# Altium PCB Buck-Converter-MP2315.pcbdoc
Units mil, origin at the board's own origin, x right, y up, seen from the top; angles counter-clockwise.
Board outline 2192.5 x 1797.4 mil, 2 copper layers (Top Layer, Bottom Layer); 23 components, 11 nets, 54 pads, 22 vias.
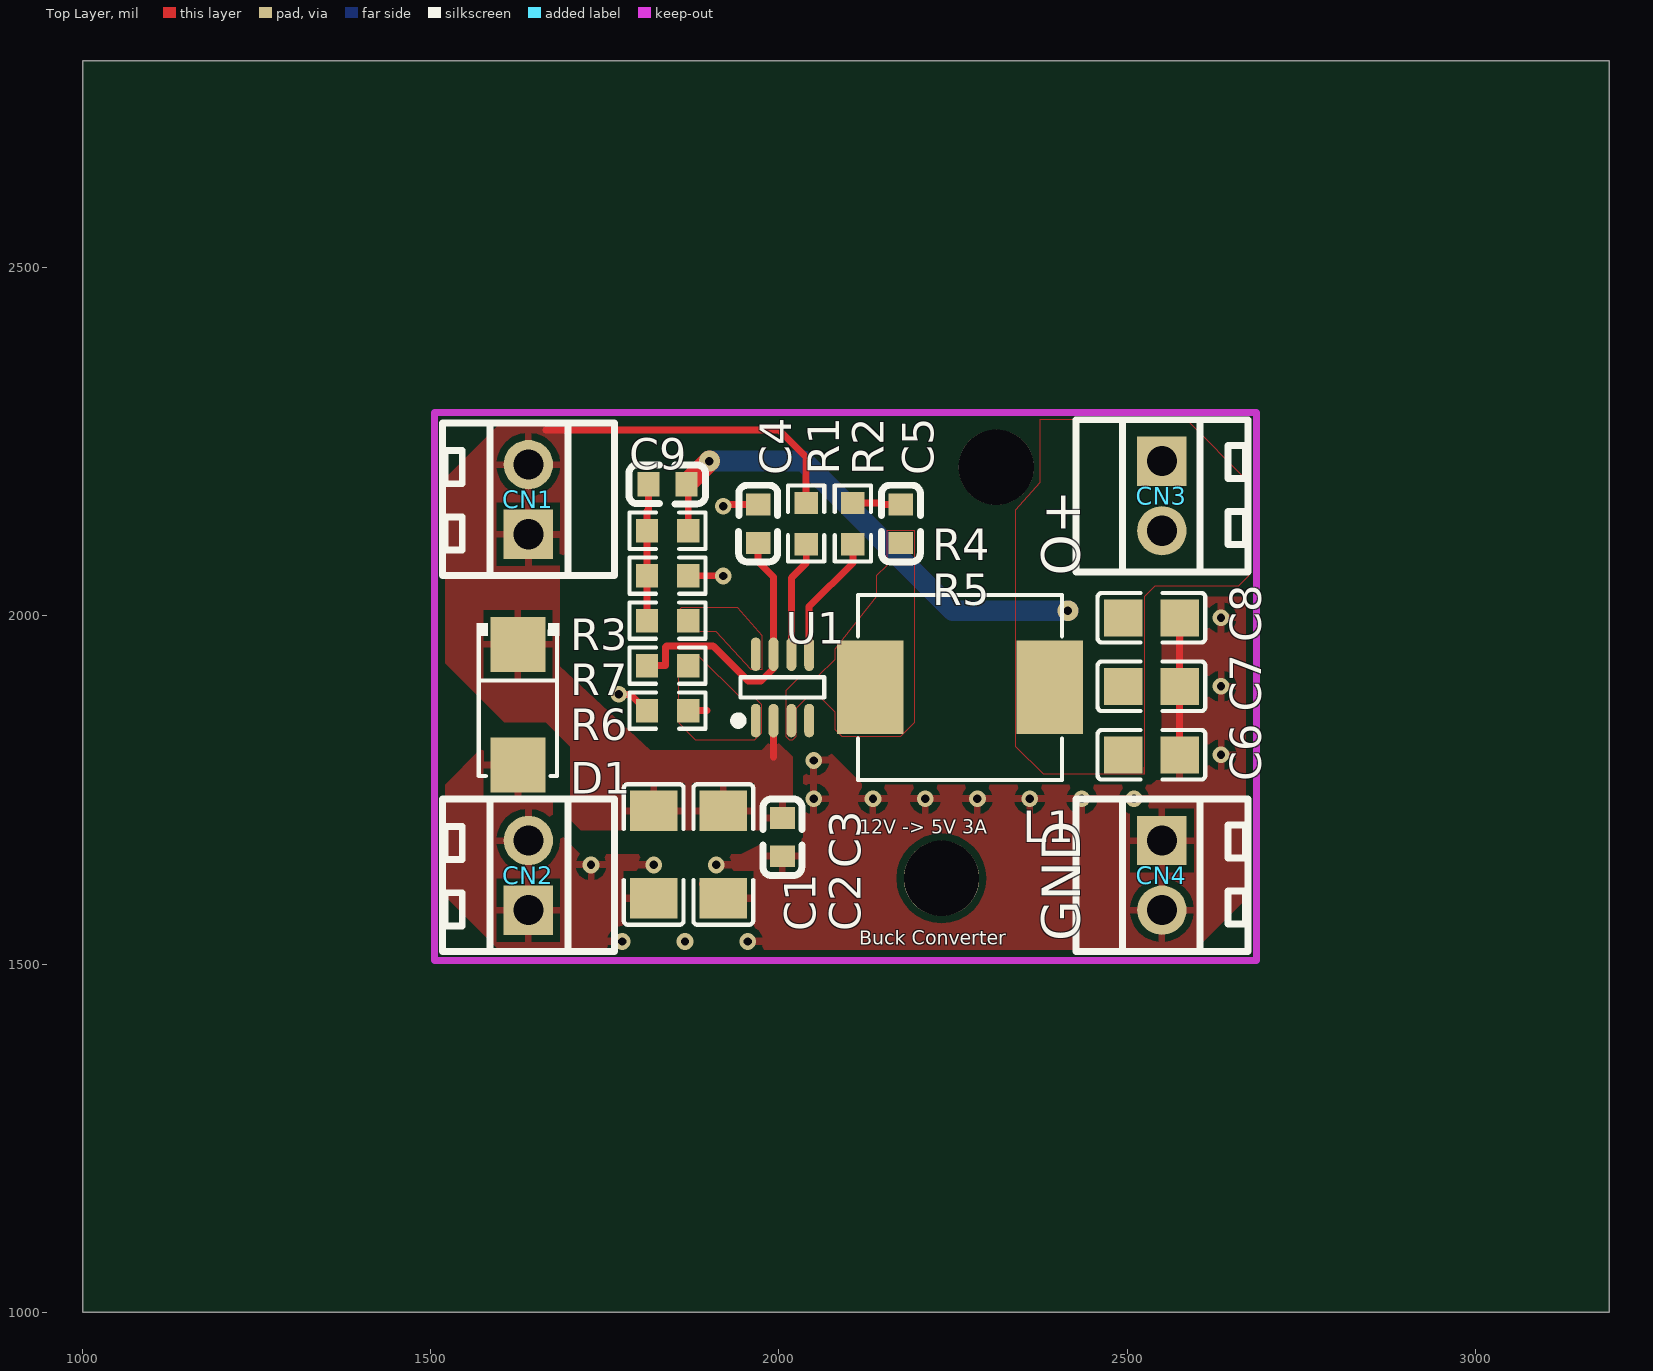
[diagram p0: Top Layer view]
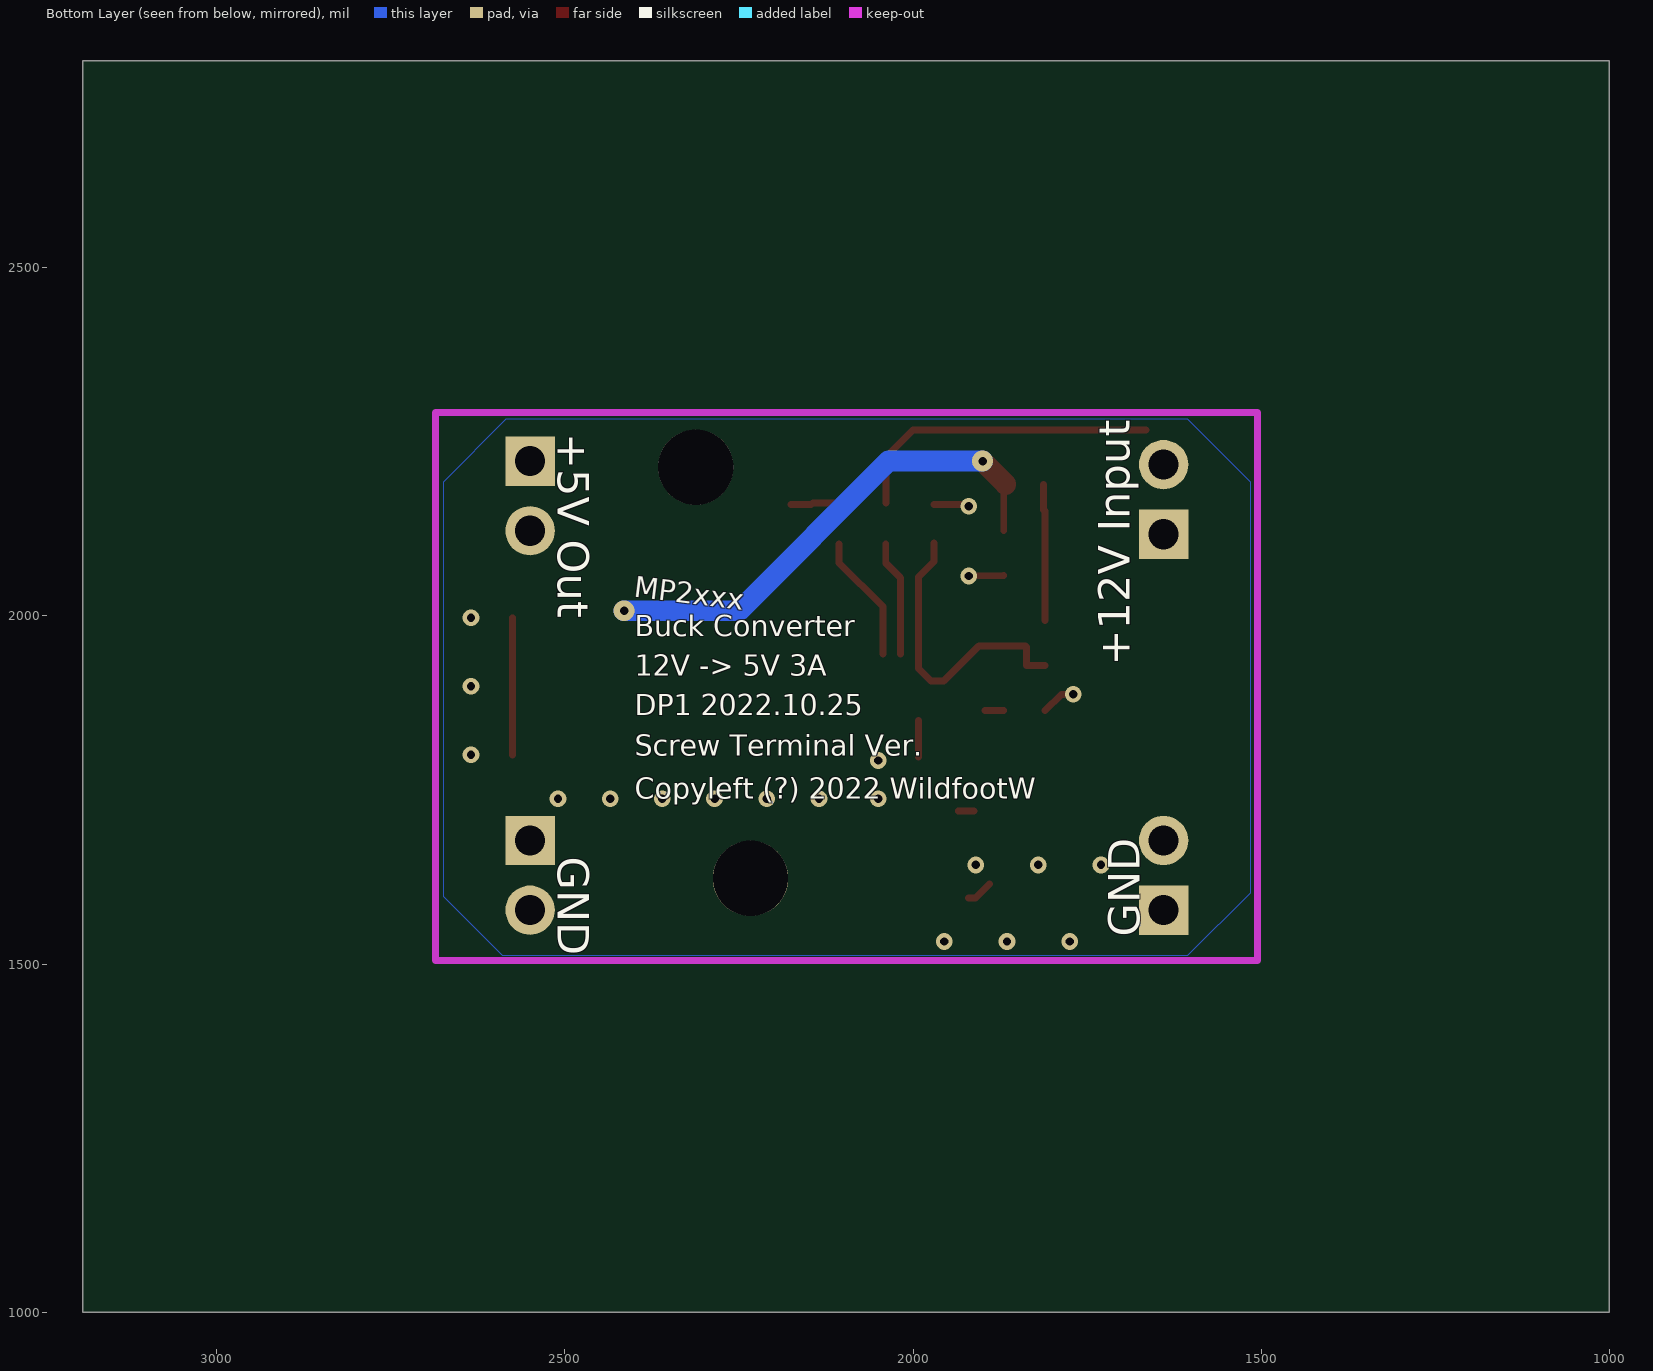
[diagram p1: Bottom Layer view, seen from below]

## Layer stack, top to bottom
Top Solder: solder mask 0.4, Solder Resist, Dk 3.5
Top Layer: signal copper 1.4
Dielectric1: dielectric 12.6, FR-4, Dk 4.8
Bottom Layer: signal copper 1.4
Bottom Solder: solder mask 0.4, Solder Resist, Dk 3.5

## Board outline
3192.5,1000 1000,1000 1000,2797.4 3192.5,2797.4

## Design rules (kind name [scope] priority, off if disabled: settings)
Clearance [All] p1: gap=10 ignorepadtopadclearanceinfootprint=FALSE except(0: Arc-Hole Track-Hole SMDPad-Hole THPad-Hole Via-Hole Fill-Hole Poly-Hole Region-Hole Text-Hole)
PolygonConnect [All] p1: connectstyle=Relief reliefconductorwidth=10 reliefentries=4 polygonreliefangle="90 Angle" airgapwidth=10
RoutingVias [All] p1: holewidth=28 width=50 viastyle="Through Hole" minholewidth=28 minwidth=50 maxholewidth=28 maxwidth=50
SolderMaskExpansion [All] p1: expansion=4 istentingtop=FALSE
Width [All] p1: maxlimit=10 minlimit=10 preferedwidth=10
30 further rules are at their usual default settings.

## Components (designator, comment, footprint, x,y, rotation, side; value= is the part's Value field where it differs from the comment)
C1 "22uF" C1206 1820,1657.4 r90 top
C2 "N/A" C1206 1920,1657.4 r90 top
C3 "0.1uf" C0603 2005,1682.4 r90 top
C4 "0.1uf" C0603 1970,2132.4 r270 top
C5 "0.1uf" C0603 2175,2132.4 r270 top
C6 "22uF" C0805 2535,1800.55 r180 top
C7 "22uF" C0805 2535,1898.98 r180 top
C8 "N/A" C0805 2535,1997.4 r180 top
C9 "33pf" C0603 1839.81,2188.96 r0 top
CN1 "DB125-2.54-2P-GN" CONN-TH_DB125-2.54-2P-GN 1640,2167.4 r90 top
CN2 "DB125-2.54-2P-GN" CONN-TH_DB125-2.54-2P-GN 1640,1627.4 r90 top
CN3 "DB125-2.54-2P-GN" CONN-TH_DB125-2.54-2P-GN 2550,2172.4 r270 top
CN4 "DB125-2.54-2P-GN" CONN-TH_DB125-2.54-2P-GN 2550,1627.4 r270 top
D1 "SMAJ12A" SMA_L4.3-W2.6-LS5.1-RD 1625,1872.4 r270 top
L1 "4.7uH" IND-SMD_L7.3-W6.6 2260,1897.4 r180 top
R1 "100K" R0603 2039.12,2132.7 r270 top
R2 "10R" R0603 2106.09,2132.7 r90 top
R3 "20K" R0603 1840,1993.18 r180 top
R4 "40.2K" R0603 1840,2122.4 r0 top
R5 "7.5K" R0603 1840,2057.79 r180 top
R6 "9.09K" R0603 1840,1863.96 r0 top
R7 "100K" R0603 1840,1928.57 r180 top
U1 "MP2315GJ-Z" TSOT-23-8_L2.9-W1.6-P0.65-LS2.8-BR 2005,1897.4 r270 top

## Footprints (in the part's own frame and the unit in brackets; to place one, negate y for a bottom-side part, rotate by r counter-clockwise, add the part's x,y. Pads: shape width x height; smd on the part's side, far side on the other; paste and mask are expansions set on the pad)
C0603 [mm]
  rect 0.8x0.9 smd: 1(-0.7,0) 2(0.7,0)
  silkscreen extent -1.41,-0.71 1.39,0.72
C0805 [mm]
  rect 1.41x1.35 smd: 1(-1.03,0) 2(1.03,0)
  silkscreen extent -1.96,-0.9 1.96,0.9
C1206 [mm]
  rect 1.485x1.728 smd: 1(-1.593,0) 2(1.593,0)
  silkscreen extent -2.56,-1.09 2.56,1.09
CONN-TH_DB125-2.54-2P-GN [mm]
  rect 1.8x1.8 hole 1.1: 1(-1.27,0)
  round 1.8 hole 1.1: 2(1.27,0)
  silkscreen extent -2.78,-3.14 2.78,3.14
IND-SMD_L7.3-W6.6 [mm]
  rect 2.424x3.42 smd: 1(3.278,0) 2(-3.278,0)
  silkscreen extent -3.73,-3.38 3.73,3.38
R0603 [mil]
  rect 31.75x34.02 smd: 1(-29.66,0) 2(29.65,0)
  silkscreen extent -55,-26 55,26
SMA_L4.3-W2.6-LS5.1-RD [mm]
  rect 2x2 smd: 1(-2.2,0) 2(2.2,0)
  silkscreen extent -2.98,-1.5 2.6,1.5
TSOT-23-8_L2.9-W1.6-P0.65-LS2.8-BR [mil]
  oval 48.11x14.33 smd: 1(47.68,-38.39) 2(47.69,-12.8) 3(47.69,12.79) 4(47.68,38.39) 5(-47.68,38.39) 6(-47.67,12.79) 7(-47.67,-12.8) 8(-47.68,-38.39)
  silkscreen extent -15,-69 54,60

## Free pads (board coordinates)
  round 108.27 hole 108.27 unplated: ""(2233.35,1623.11) ""(2312.08,2213.66)

## Via types
v1: diameter 24, hole 12, Top Layer to Bottom Layer, 20 vias
v2: diameter 30, hole 12, Top Layer to Bottom Layer, 2 vias

## Nets (pads, with @x,y where several pads share a name; then routed paths per layer and width w, separated by ;. In a path a pad name is that pad's centre, name@x,y a point inside that pad or via, vN(x,y) a via of type N, cw(c..) or ccw(c..) an arc to the next point about the centre after c; other vN are vias at no path point)
+5V: C6.2 C7.2 C8.2 C9.2 CN3.1 CN3.2 L1.2 R4.2 | length 718.6
  Top Layer w10: C9.2 1869.56,2186.77 1869.66,2186.77 1869.66,2150.42 R4.2
  Top Layer w30: C9.2 1867.37,2189.77 v2(1900,2222.4)
  Bottom Layer w30: v2(1900,2222.4) 2035,2222.4 2250,2007.4 v2(2415,2007.4)
+12V: C1.2 C2.2 C3.2 CN1.1 CN1.2 D1.1 R1.1 U1.2 | length 538.5
  Top Layer w10: 1665,2267.4 2000,2267.4 2039.1,2228.3 R1.1 ; C2.2 1912.52,1720.1 C2.2@1935.03,1720.1 ; 1992.2,1797.4 U1.2
C5_1: C5.1 R2.2 | length 69.9
  Top Layer w10: R2.2 2143.87,2162.36 2146.27,2159.96 C5.1
GND: C1.1 C2.1 C3.1 C4.1 C6.1 C7.1 C8.1 CN2.1 CN2.2 CN4.1 CN4.2 D1.2 R5.1 R6.1 U1.4 | length 386.6
  Top Layer w10: v1(1770,1887.4) 1786.91,1887.4 R6.1 ; R5.1 v1(1920,2057.4) ; C2.1@1890,1614.83 1910.13,1594.7 C2.1 ; v1(1920,2157.4) 1922.56,2159.96 C4.1 ; C6.1 2575.55,1813.22 C7.1 C8.1
  other v1: 1775,1532.4 1865,1532.4 1955,1532.4 1730,1642.4 1820,1642.4 1910,1642.4 2050,1737.4 2135,1737.4 2210,1737.4 2285,1737.4 2360,1737.4 2435,1737.4 2510,1737.4 2050,1792.4 2635,1800.55 2635,1898.97 2635,1997.4
R3_2: C9.1 R3.2 R4.1 R5.2 | length 196.6
  Top Layer w10: R3.2@1810.35,1993.18 1810.35,2057.79 1810.35,2122.4 1810.35,2150.42 1812.25,2152.32 C9.1@1812.25,2188.96
U1_AAM: R6.2 R7.1 U1.1 | length 26.9
  Top Layer w10: R6.2 1896.55,1863.96
U1_BST: R2.1 U1.5 | length 183.9
  Top Layer w10: U1.5 2043.39,2013.46 2106.09,2076.16 R2.1
U1_EN: R1.2 U1.6 | length 166.8
  Top Layer w10: U1.6 2017.79,2054.82 2039.13,2076.16 R1.2
U1_FB: R3.1 U1.8
U1_SW: C5.2 L1.1 U1.3
U1_VCC: C4.2 R7.2 U1.7 | length 427.1
  Top Layer w10: R7.2@1810.35,1928.57 1837.24,1928.57 1837.24,1955.46 1838.42,1956.64 1905.53,1956.64 1955.82,1906.35 1974.02,1906.35 1992.2,1924.53 U1.7 1992.2,2055.88 1970,2078.08 C4.2

## Polygon pours and split planes (outlines as drawn)
GND on Bottom Layer "Bottom Layer-GND" (solid, pour order 0): 2395,2282.4 2585,2282.4 2675,2192.4 2675,1597.4 2590,1512.4 1605,1512.4 1515,1602.4 1515,2192.4 1605,2282.4 2230,2282.4
+12V on Top Layer "Top Layer-+12V" (solid, pour order 1): 2010,1702.4
+5V on Top Layer "Top Layer-+5V" (solid, pour order 2): 2525,1772.4 2380,1772.4 2340,1812.4 2340,2152.4 2375,2192.4 2375,2282.4 2585,2282.4 2675,2192.4 2675,2057.4 2660,2042.4 2600,2042.4 2540,2042.4 2525,2027.4 2525,1772.4 2525,1782.4
+12V on Top Layer "Top Layer-+12V 1" (solid, pour order 3): 1715,1692.4 1700,1707.4 1700,1812.4 1665,1847.4 1605,1847.4 1515,1937.4 1515,2192.4 1605,2282.4 1680,2282.4 1695,2267.4 1695,2092.4 1685,2082.4 1685,1927.4 1815,1807.4 1975,1807.4 1985,1817.4 2000,1817.4 2020,1797.4 2020,1712.4 2005,1692.4 1715,1692.4
GND on Top Layer "Top Layer-GND" (solid, pour order 4): 1585,1822.4 1665,1822.4 1675,1812.4 1675,1697.4 1715,1657.4 1945,1657.4 1975,1672.4 2025,1672.4 2035,1682.4 2035,1822.4 2035,1867.4 2040,1872.4 2050,1872.4 2060,1862.4 2060,1817.4 2090,1787.4 2120,1757.4 2535,1757.4 2550,1772.4 2550,2022.4 2555,2027.4 2665,2027.4 2680,2012.4 2680,1602.4 2590,1512.4 1605,1512.4 1515,1602.4 1515,1752.4 1585,1822.4
U1_SW on Top Layer "Top Layer-U1_SW" (solid, pour order 5): 2080,1952.4 2080,1937.4 2055,1912.4 2030,1912.4 2010,1892.4 2010,1857.4 2010,1827.4 2015,1822.4 2020,1822.4 2025,1827.4 2025,1852.4 2025,1862.4 2025,1867.4 2040,1882.4 2060,1882.4 2070,1872.4 2080,1862.4 2080,1837.4 2090,1827.4 2135,1827.4 2165,1827.4 2175,1827.4 2195,1847.4 2195,2122.4 2155,2122.4 2155,2072.4 2140,2057.4 2140,2027.4
U1_FB on Top Layer "Top Layer-U1_FB" (solid, pour order 6): 1855,1977.4 1855,2007.4 1860,2012.4 1885,2012.4 1905,2012.4 1940,2012.4 1975,1972.4 1975,1922.4 1960,1922.4 1910,1977.4 1890,1977.4 1855,1977.4
U1_AAM on Top Layer "Top Layer-U1_AAM" (solid, pour order 7): 1855,1942.4 1855,1847.4 1880,1822.4 1965,1822.4 1975,1832.4 1975,1857.4 1975,1872.4 1965,1882.4 1945,1882.4 1885,1942.4

## Silkscreen, mask and mechanical layers (free items; w line width, h text height)
Top Overlay:
  text "O+" at 2432.5,2057.4 h55 r90
  text "12V -> 5V 3A" at 2115,1687.4 h20
  text "GND" at 2432.5,1532.4 h55 r90
  text "Buck Converter" at 2115,1527.4 h20
Bottom Overlay:
  text "+5V Out" at 2510.37,2262.4 h45 r90
  text "MP2xxx" at 2401.83,2027.51 h30 r7
  text "Buck Converter" at 2400,1970.76 h30
  text "+12V Input" at 1688.95,1928.58 h45 r270
  text "12V -> 5V 3A" at 2400,1914.13 h30
  text "DP1 2022.10.25" at 2400,1857.49 h30
  text "Screw Terminal Ver." at 2400,1799.49 h30
  text "Copyleft (?) 2022 WildfootW" at 2400,1737.4 h30
  text "GND" at 2510.37,1654.45 h45 r90
  text "GND" at 1674.63,1539.49 h45 r270